# Altium PCB Layout.PcbDoc
Units mm, origin at the board's own origin, x right, y up, seen from the top; angles counter-clockwise.
Board outline 75 x 75 mm, 4 copper layers (Top Layer, Mid 1, Mid 2, Bottom Layer), stack 0.603 mm thick; 72 components, 26 nets, 148 pads, 148 vias.
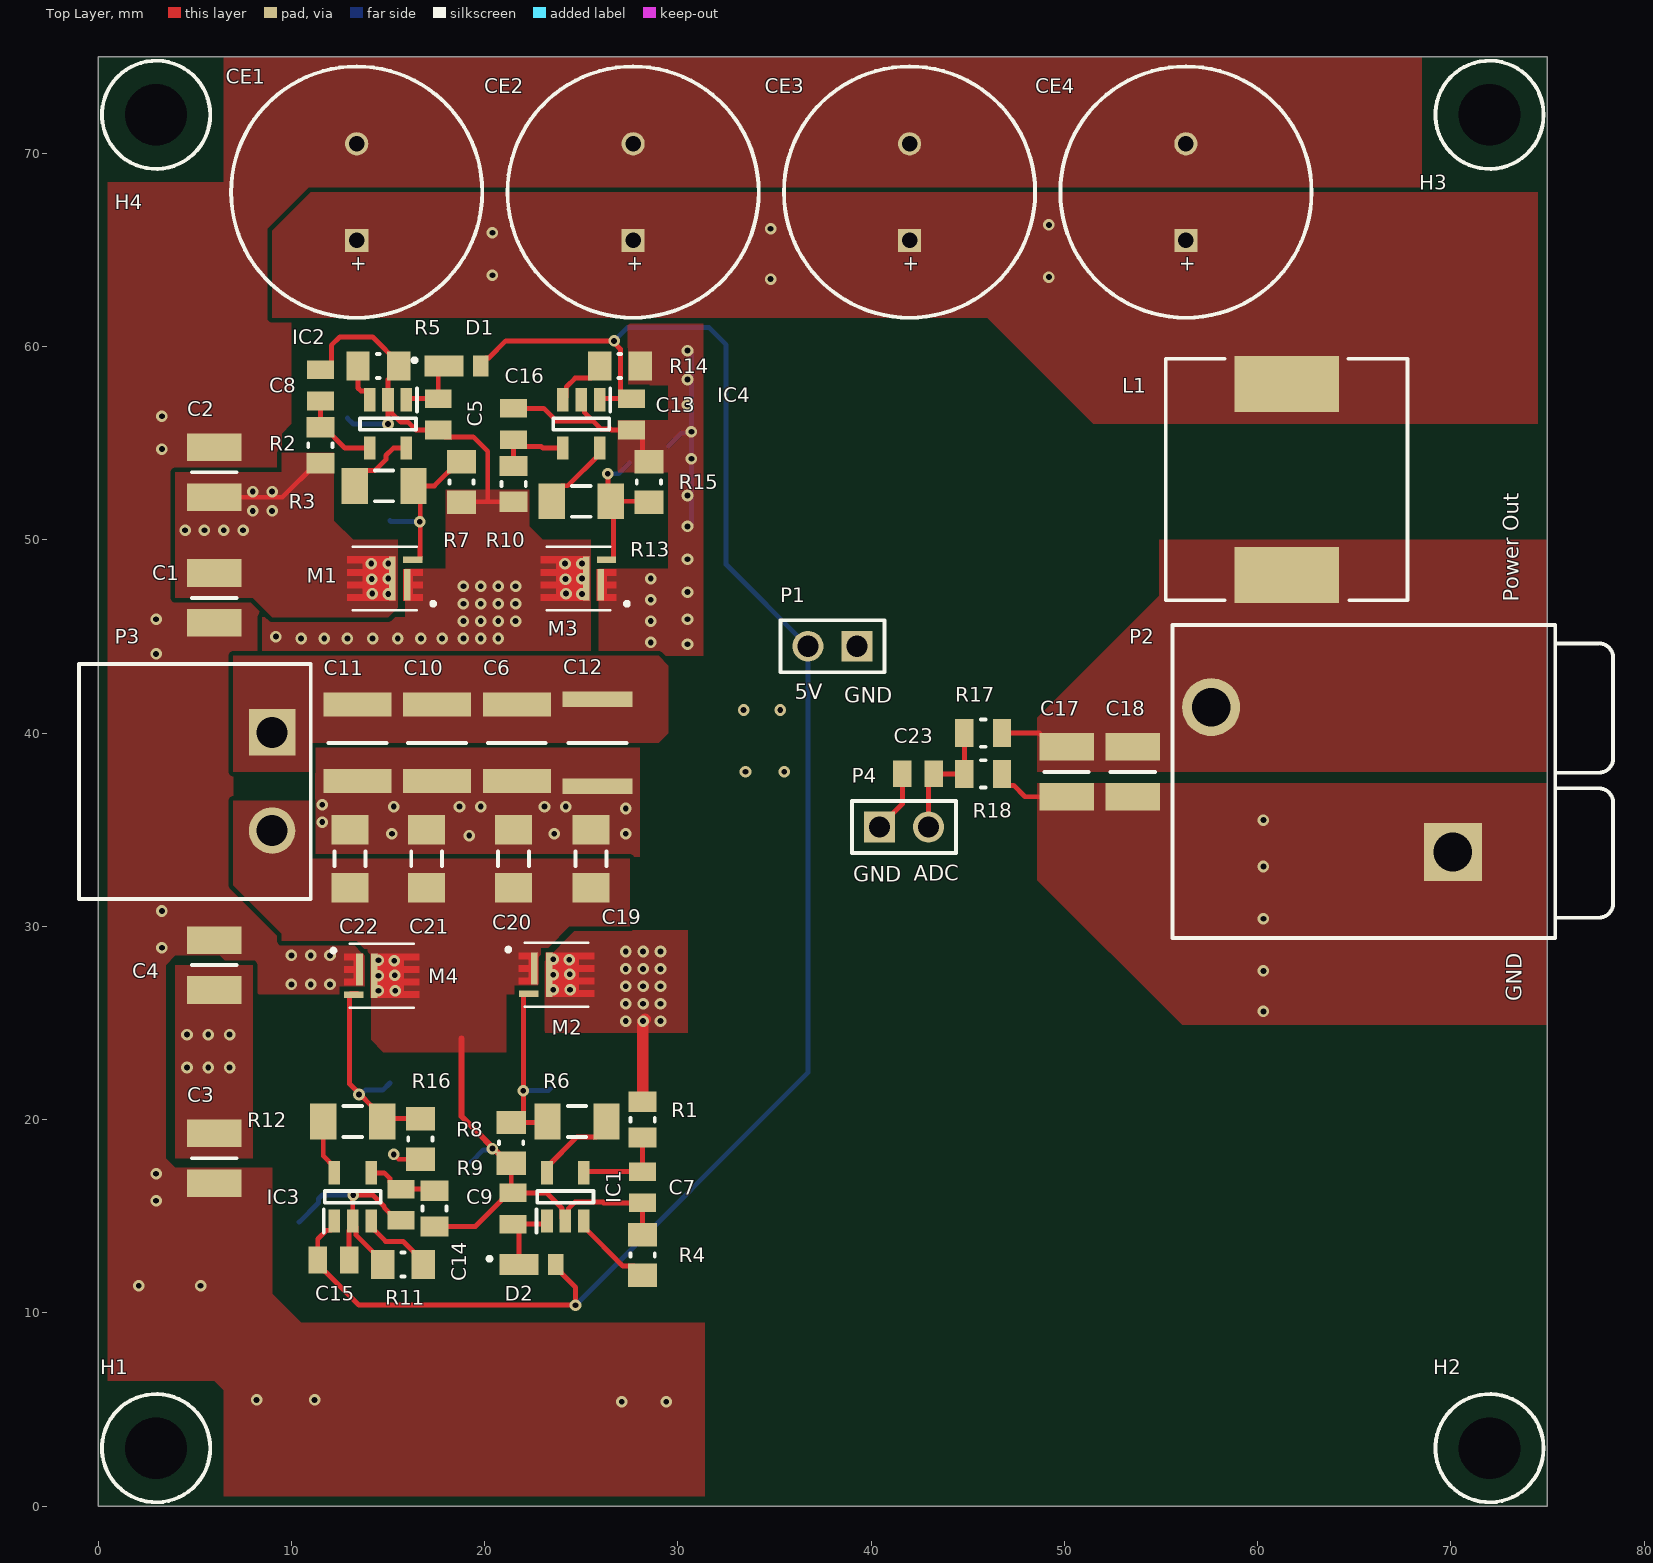
[diagram p0: Top Layer view]
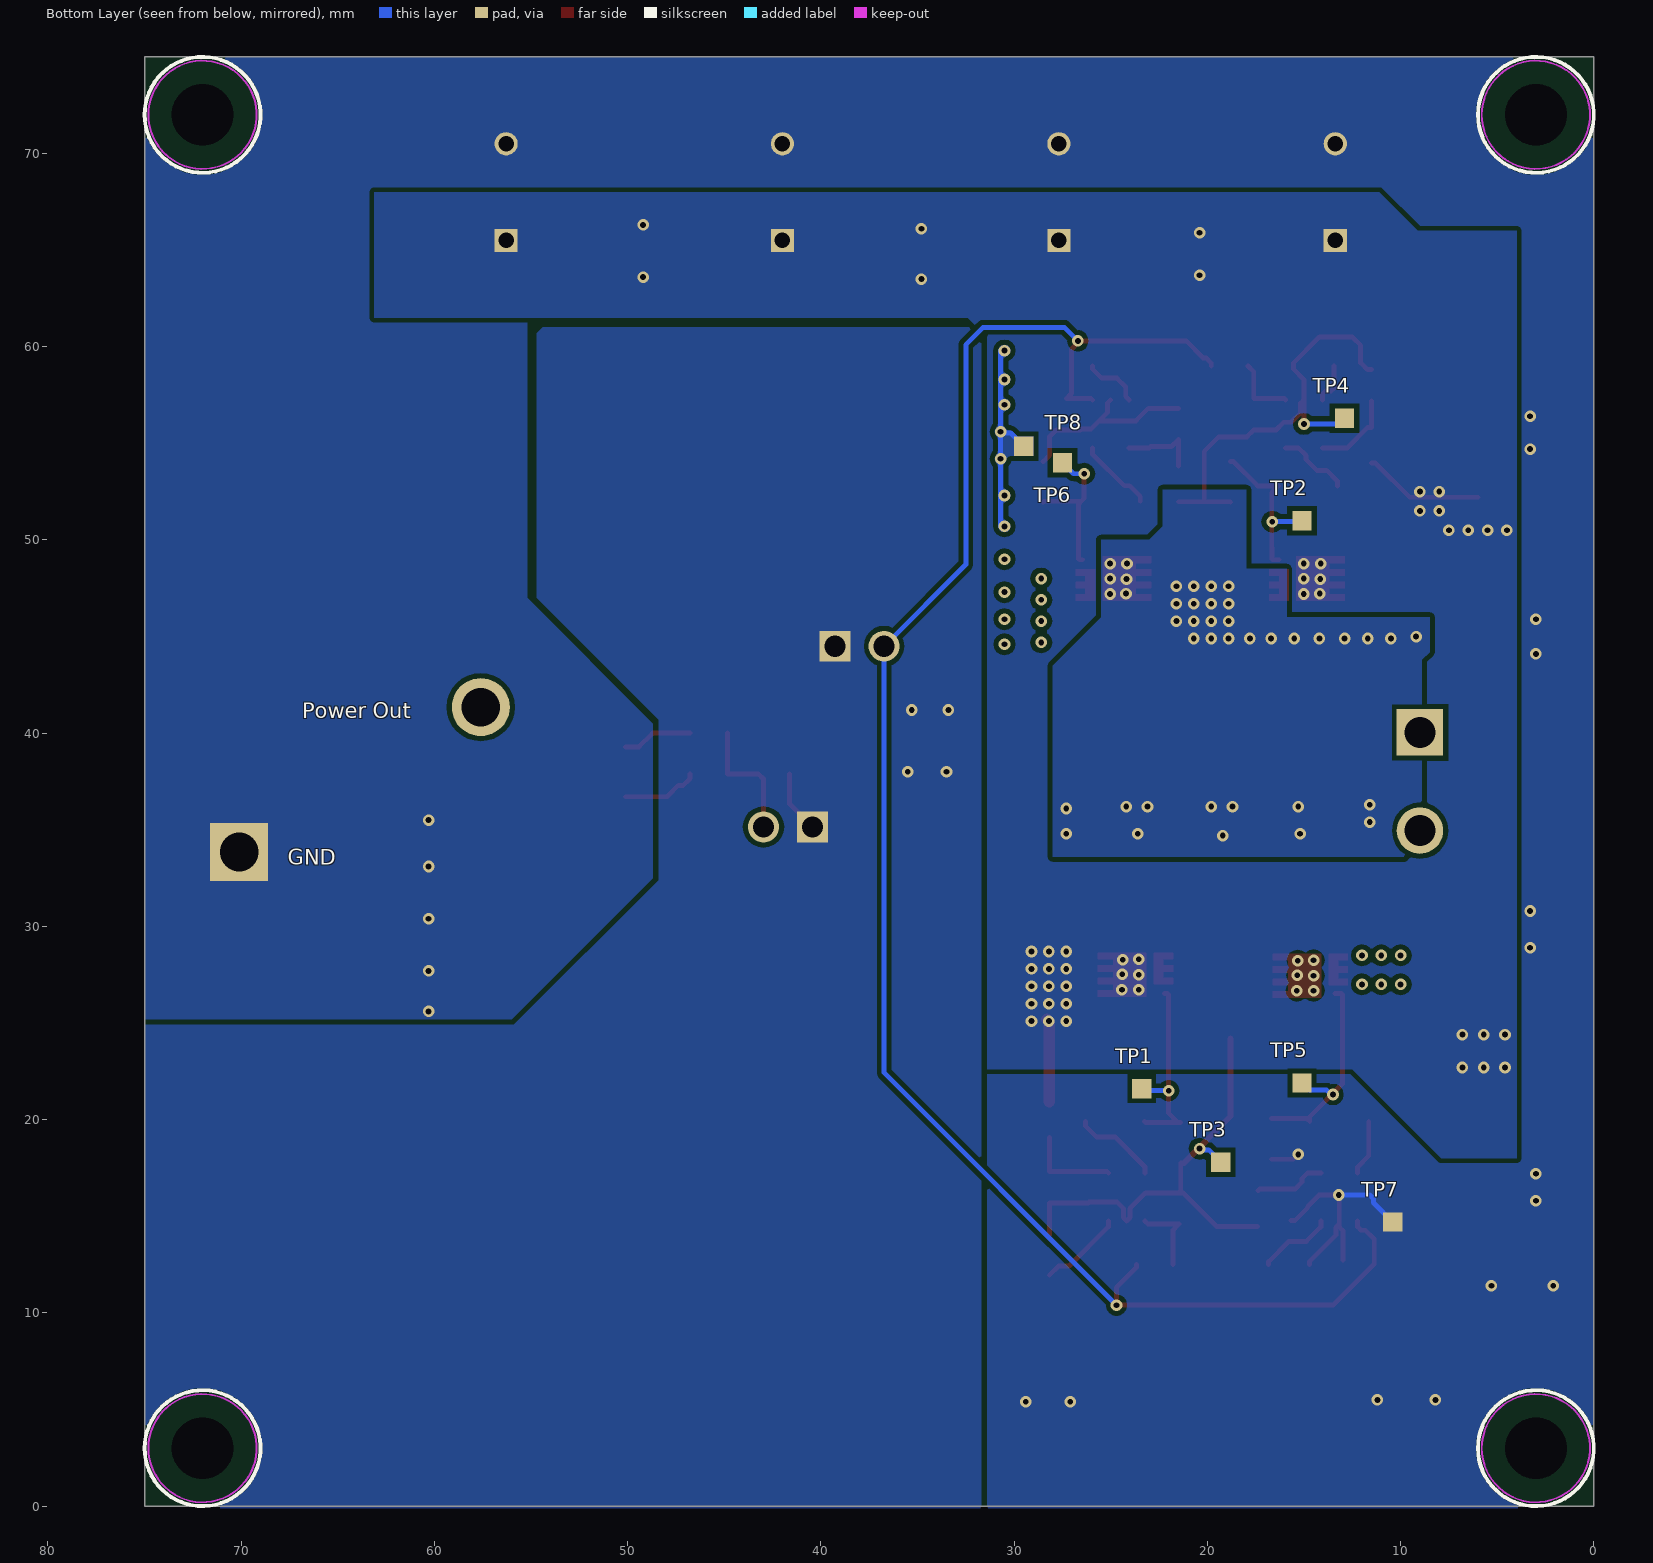
[diagram p1: Bottom Layer view, seen from below]
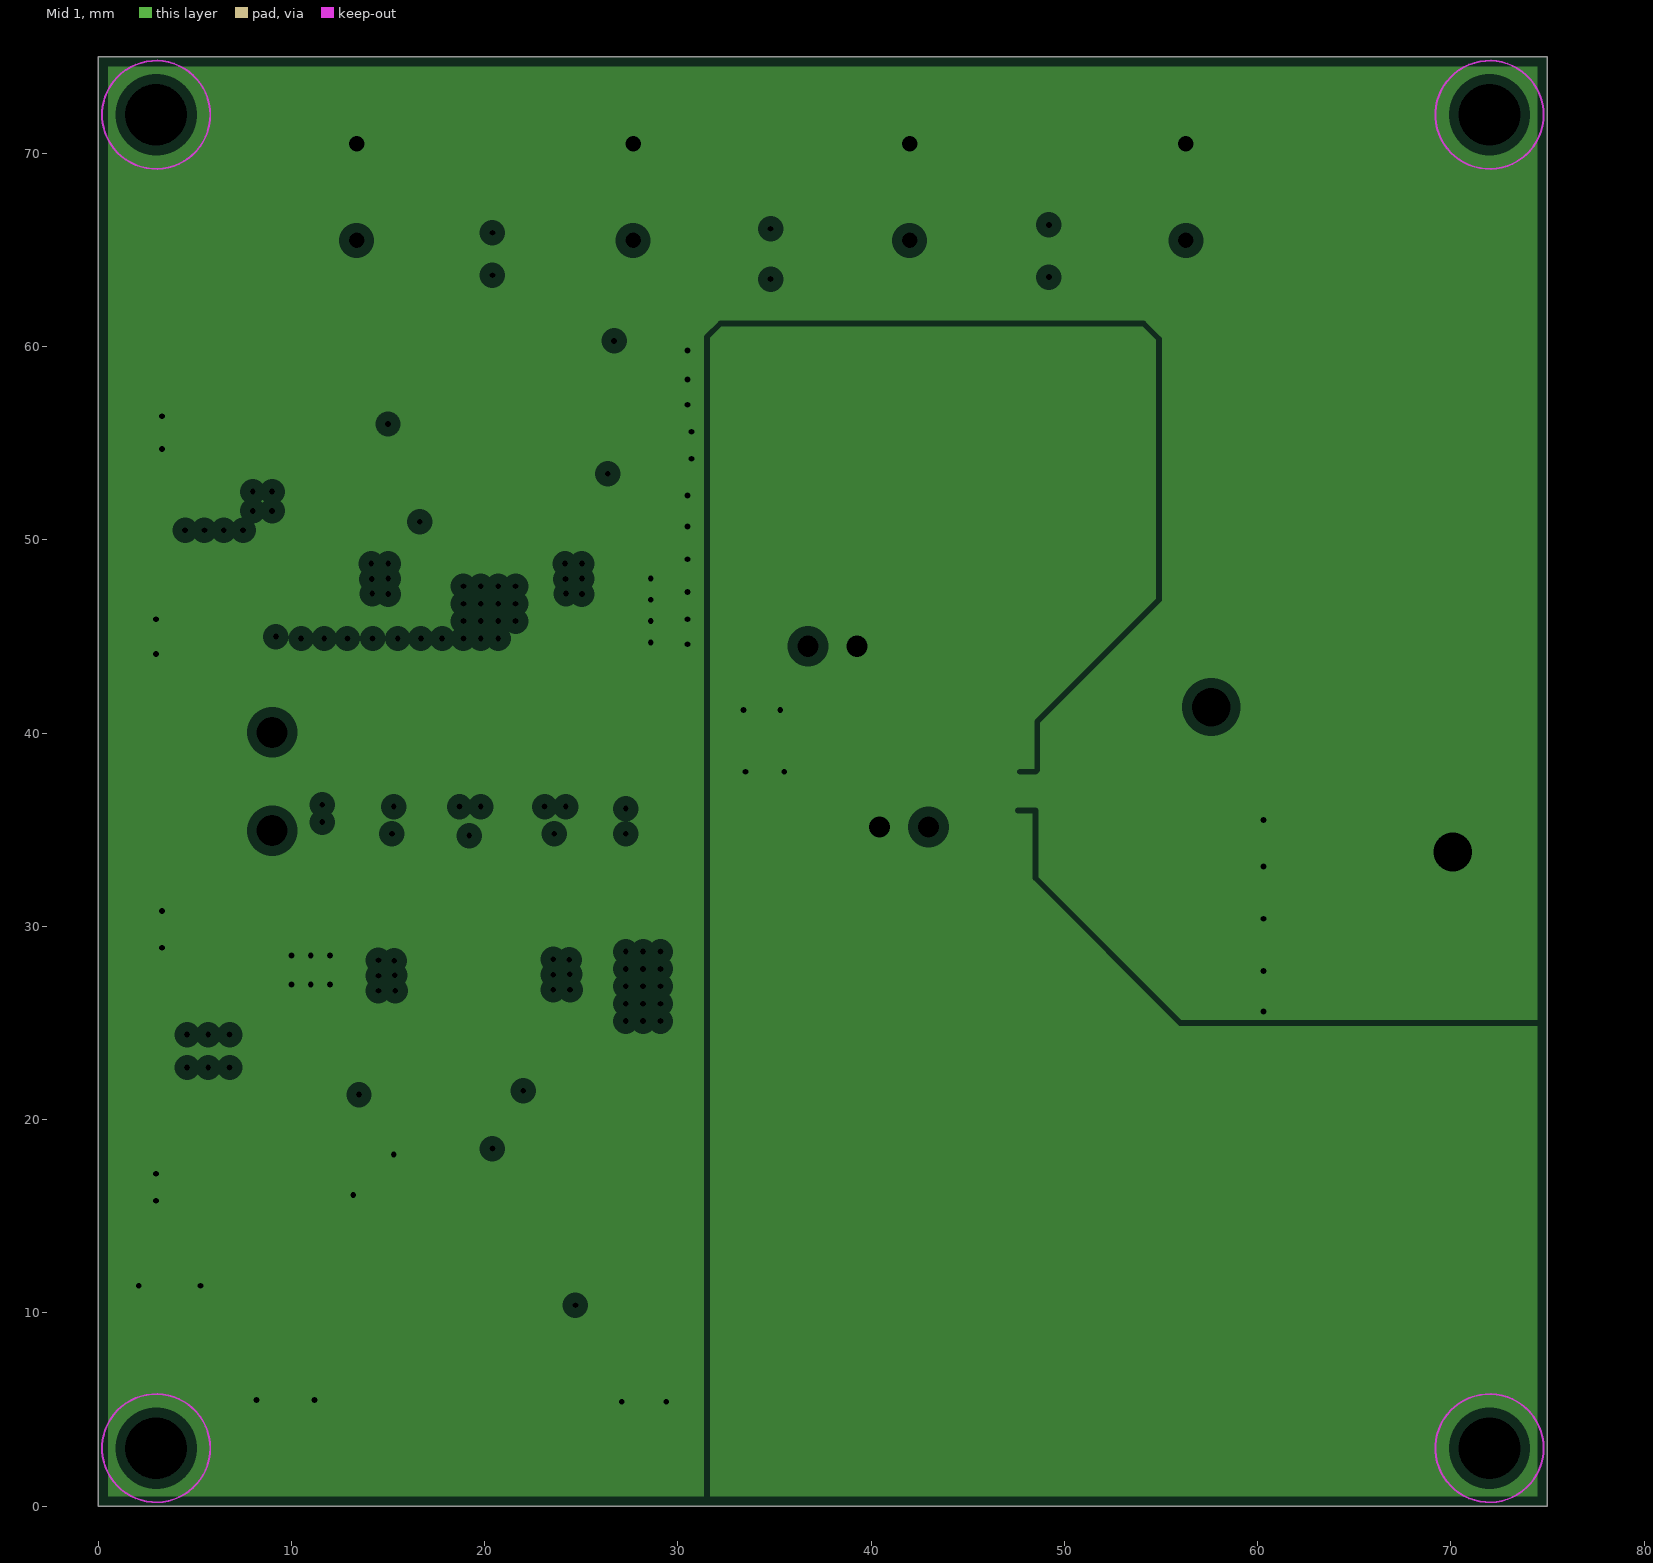
[diagram p2: Mid 1, clearances drawn from the general rule]
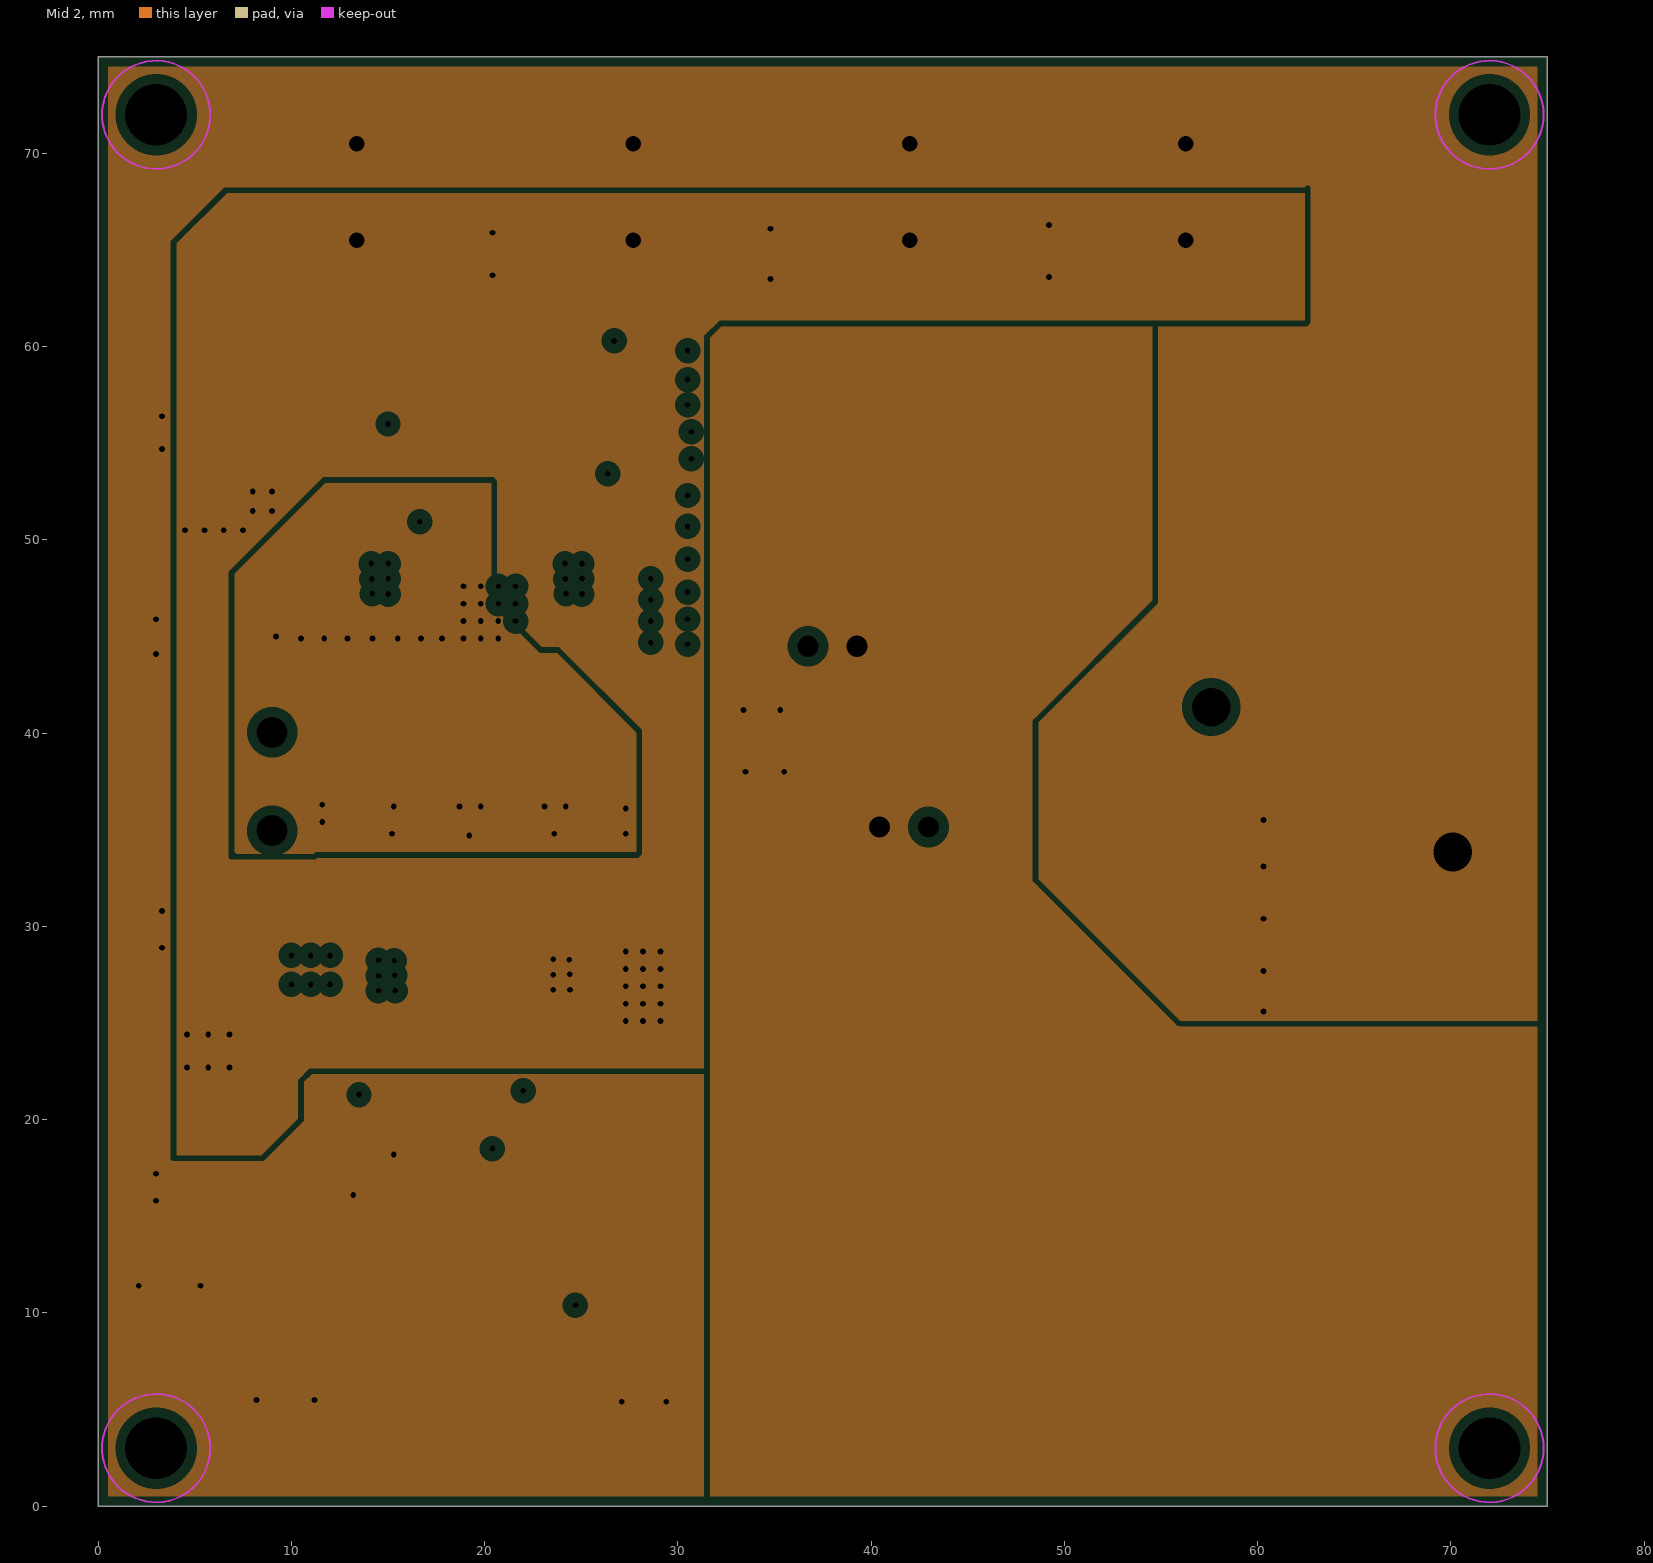
[diagram p3: Mid 2, clearances drawn from the general rule]
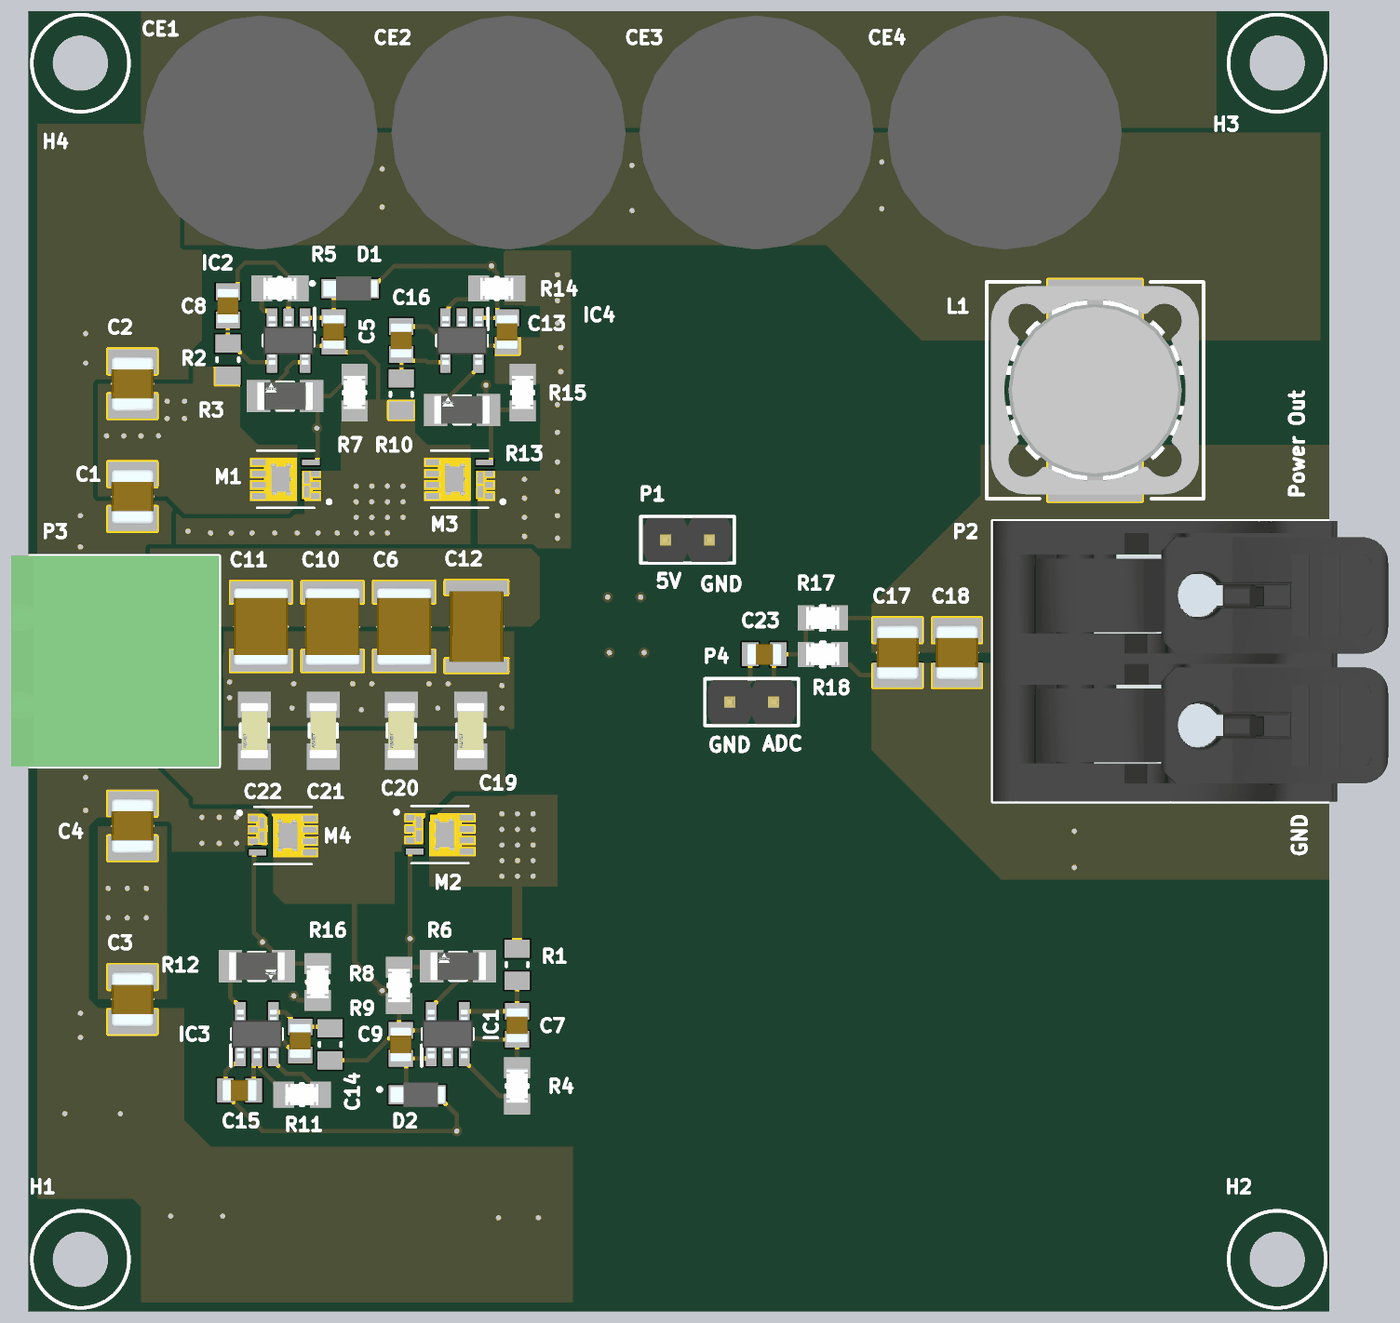
[diagram p4: 3D render of the assembled board from above, using the file's embedded part models]

## Layer stack, top to bottom
Top Solder: solder mask 0.0102, Solder Resist, Dk 3.5
Top Layer: signal copper 0.0356
Dielectric 2: prepreg 0.0711, PP-006, Dk 4.1
Mid 1: plane copper 0.035, net GND
Dielectric 1: dielectric 0.32, FR-4, Dk 4.8
Mid 2: plane copper 0.035
Dielectric 3: prepreg 0.0711, PP-006, Dk 4.1
Bottom Layer: signal copper 0.0356
Bottom Solder: solder mask 0.0102, Solder Resist, Dk 3.5

## Board outline
0,75 75,75 75,0 0,0

## Design rules (kind name [scope] priority, off if disabled: settings)
Clearance [All] p1: gap=0.254 ignorepadtopadclearanceinfootprint=TRUE except(0: Arc-Hole Track-Hole SMDPad-Hole THPad-Hole Via-Hole Fill-Hole Poly-Hole Region-Hole Text-Hole)
Height [All] p1: minheight=0 maxheight=30 prefheight=12.7
HoleSize [All] p1: absolutevalues=TRUE maxlimit=30 minlimit=0.025 maxpercent=80.000 minpercent=20.000
HoleToHoleClearance [All] p1: gap=0.1 allowstackedmicrovias=TRUE
MinimumSolderMaskSliver [All] p1: minsoldermaskwidth=0.1
PlaneClearance [All] p1: clearance=0.508
PlaneConnect [All] p1: planeconnectstyle=Direct reliefexpansion=0.508 reliefentries=4 reliefconductorwidth=0.254 reliefairgap=0.254
PolygonConnect [All] p1: connectstyle=Direct reliefconductorwidth=0.254 reliefentries=4 polygonreliefangle="90 Angle" airgapwidth=0.254
RoutingVias [All] p1: holewidth=0.3 width=0.6 viastyle="Through Hole" minholewidth=0.3 minwidth=0.6 maxholewidth=0.711 maxwidth=1.27
SilkToSilkClearance [All] p1: silktosilkclearance=0.1
SilkToSolderMaskClearance [IsPad] p1: minsilkscreentomaskgap=0.1 clearancetoexposedcopper=TRUE
SolderMaskExpansion [All] p1: expansion=0.102 istentingtop=FALSE
Width [All] p1: maxlimit=0.6 minlimit=0.254 preferedwidth=0.254
22 further rules are at their usual default settings.

## Components (designator, comment, footprint, x,y, rotation, side; value= is the part's Value field where it differs from the comment)
C1 "885012209048" CAPC3225X280N 6,47 r90 top
C2 "885012209048" CAPC3225X280N 6,53.5 r270 top
C3 "885012209048" CAPC3225X280N 6,18 r90 top
C4 "885012209048" CAPC3225X280N 6,28 r270 top
C5 "885012207098" CAPC2012X90N 17.6,56.5 r90 top
C6 "C1812C104JAGACAUTO" CAPC4532X220N 21.663,39.5 r270 top
C7 "885012007057" CAPC2012X70N 28.175,16.5 r90 top
C8 "885012007057" CAPC2012X70N 11.5,58 r270 top
C9 "885012207098" CAPC2012X90N 21.475,15.4 r270 top
C10 "C1812C104JAGACAUTO" CAPC4532X220N 17.539,39.5 r270 top
C11 "C1812C104JAGACAUTO" CAPC4532X220N 13.414,39.5 r270 top
C12 "C4532C0G2E473J320KA" CAPC4532X350N 25.837,39.5 r270 top
C13 "885012207098" CAPC2012X90N 27.6,56.5 r90 top
C14 "885012007057" CAPC2012X70N 15.675,15.6 r90 top
C15 "885012207098" CAPC2012X90N 12.175,12.746 r180 top
C16 "885012007057" CAPC2012X70N 21.5,56 r270 top
C17 "885012209048" CAPC3225X280N 50.111,38 r90 top
C18 "885012209048" CAPC3225X280N 53.536,38 r90 top
C19 "C1206C471J1GAC" FP-C1206C-EB-IPC_A 25.5,33.5 r90 top value="470 pF"
C20 "C1206C471J1GAC" FP-C1206C-EB-IPC_A 21.5,33.5 r90 top value="470 pF"
C21 "C1206C471J1GAC" FP-C1206C-EB-IPC_A 17,33.5 r90 top value="470 pF"
C22 "C1206C471J1GAC" FP-C1206C-EB-IPC_A 13.032,33.5 r90 top value="470 pF"
C23 "885012207092" CAPC2012X90N 42.431,37.9 r0 top
CE1 "860160578032" CAPPRD500W62D1300H2650 13.379,65.5 r90 top
CE2 "860160578032" CAPPRD500W62D1300H2650 27.684,65.5 r90 top
CE3 "860160578032" CAPPRD500W62D1300H2650 41.988,65.5 r90 top
CE4 "860160578032" CAPPRD500W62D1300H2650 56.292,65.5 r90 top
D1 "RB400VAM-50TR" RB400VAM50TR 17.9,59 r270 top
D2 "RB400VAM-50TR" RB400VAM50TR 21.775,12.5 r270 top
H1 "M3 Mounting Hole" "M3 HOLE" 3,3 r0 top
H2 "M3 Mounting Hole" "M3 HOLE" 72,3 r0 top
H3 "M3 Mounting Hole" "M3 HOLE" 72,72 r0 top
H4 "M3 Mounting Hole" "M3 HOLE" 3,72 r0 top
IC1 "IR1161LTRPBF" SOT95P280X145-5N 24.175,16 r90 top
IC2 "IR1161LTRPBF" SOT95P280X145-5N 15,56 r270 top
IC3 "IR1161LTRPBF" SOT95P280X145-5N 13.175,16 r90 top
IC4 "IR1161LTRPBF" SOT95P280X145-5N 25,56 r270 top
L1 "742792901" WE-PF 61.5,53.129 r270 top
M1 "BSZ070N08LS5ATMA1" TRANS_BSZ037N06LS5ATMA1 14.835,48 r180 top
M2 "BSZ070N08LS5ATMA1" TRANS_BSZ037N06LS5ATMA1 23.725,27.5 r0 top
M3 "BSZ070N08LS5ATMA1" TRANS_BSZ037N06LS5ATMA1 24.86,48 r180 top
M4 "BSZ070N08LS5ATMA1" TRANS_BSZ037N06LS5ATMA1 14.675,27.45 r0 top
P1 "61300211121" 61300211121 38,44.5 r180 top
P2 "691404910002B" 691404910002B 67,37.5 r90 top
P3 "691313510002" 691313510002 5,37.5 r270 top
P4 "61300211121" 61300211121 41.7,35.146 r0 top
R1 "CRCW08051K00FKEA" RESC2013X50X30NL20T20 28.175,20 r90 top
R2 "CRCW08051K00FKEA" RESC2013X50X30NL20T20 11.5,54.9 r90 top
R3 "CRCW120610R0FKEA" FP-CRCW1206-E3-IPC_A 14.8,52.8 r180 top
R4 "CRCW080510K0FKEA" FP-CRCW0805-E3-IPC_A 28.175,13 r270 top
R5 "CRCW080510K0FKEA" FP-CRCW0805-E3-IPC_A 14.5,59 r180 top
R6 "CRCW120610R0FKEA" FP-CRCW1206-E3-IPC_A 24.775,19.908 r180 top
R7 "CRCW080510K0FKEA" FP-CRCW0805-E3-IPC_A 18.8,53 r90 top
R8 "CRCW080510K0FKEA" FP-CRCW0805-E3-IPC_A 21.375,18.8 r270 top
R9 "CRCW08051K00FKEA" RESC2013X50X30NL20T20 17.4,15.4 r270 top
R10 "CRCW08051K00FKEA" RESC2013X50X30NL20T20 21.5,52.9 r90 top
R11 "CRCW080510K0FKEA" FP-CRCW0805-E3-IPC_A 15.775,12.5 r0 top
R12 "CRCW120610R0FKEA" FP-CRCW1206-E3-IPC_A 13.175,19.908 r0 top
R13 "CRCW120610R0FKEA" FP-CRCW1206-E3-IPC_A 25,52 r180 top
R14 "CRCW080510K0FKEA" FP-CRCW0805-E3-IPC_A 27,59 r180 top
R15 "CRCW080510K0FKEA" FP-CRCW0805-E3-IPC_A 28.5,53 r270 top
R16 "CRCW080510K0FKEA" FP-CRCW0805-E3-IPC_A 16.675,19 r270 top
R17 "CRCW08051M00FKEA" FP-CRCW0805-e3-MFG 45.8,40 r0 top
R18 "CRCW0805120KFKEA" FP-CRCW0805-e3-MFG 45.8,37.896 r180 top
TP1 "TP" "TEST POINT" 23.4,21.6 r180 bottom
TP2 "TP" "TEST POINT" 15.1,51 r180 bottom
TP3 "TP" "TEST POINT" 19.3,17.8 r180 bottom
TP4 "TP" "TEST POINT" 12.9,56.3 r180 bottom
TP5 "TP" "TEST POINT" 15.1,21.9 r180 bottom
TP6 "TP" "TEST POINT" 27.5,54 r180 bottom
TP7 "TP" "TEST POINT" 10.4,14.7 r180 bottom
TP8 "TP" "TEST POINT" 29.5,54.85 r180 bottom

## Footprints (in the part's own frame and the unit in brackets; to place one, negate y for a bottom-side part, rotate by r counter-clockwise, add the part's x,y. Pads: shape width x height; smd on the part's side, far side on the other; paste and mask are expansions set on the pad)
61300211121 [mm] "Pin Header, pitch 2.54 mm, THT, Vertical, single row, 2p"
  rect 1.6x1.6 hole 1.1: 1(-1.27,0)
  round 1.6 hole 1.1: 2(1.27,0)
  silkscreen extent -2.69,-1.35 2.69,1.35, body extent -2.54,-1.27 2.54,1.27, height 8.57
691313510002 [mm] "5,08mm - PCB Headers - Horizontal - Closed ends - 02p"
  rect 2.4x2.4 hole 1.6: 1(-2.54,4)
  round 2.4 hole 1.6: 2(2.54,4)
  silkscreen extent -6.08,-6 6.08,6, body extent -6.08,-6 6.08,6, height 8.55
691404910002B [mm] "7.50 mm Screwless Clamp Power Connector, 2p"
  rect 3x3 hole 2: 1(-3.65,-3.1)
  round 3 hole 2: 2(3.85,9.4)
  silkscreen extent -8.1,-11.4 8.1,11.4, body extent -8.1,-11.4 8.1,11.4, height 24.16
CAPC2012X70N [mm]
  rect 0.96x1.39 smd: 1(-0.81,0) 2(0.81,0)
  body extent -1,-0.63 1,0.63, height 0.7
CAPC2012X90N [mm]
  rect 0.96x1.39 smd: 1(-0.81,0) 2(0.81,0)
  body extent -1,-0.63 1,0.63, height 0.9
CAPC3225X280N [mm]
  rect 1.43x2.82 smd: 1(-1.29,0) 2(1.29,0)
  silkscreen extent 0,-1.15 0,1.15, body extent -1.6,-1.25 1.6,1.25, height 2.8
CAPC4532X220N [mm]
  rect 1.25x3.52 smd: 1(-1.98,0) 2(1.98,0)
  silkscreen extent 0,-1.5 0,1.5, body extent -2.25,-1.6 2.25,1.6, height 2.2
CAPC4532X350N [mm]
  rect 0.81x3.61 smd: 1(-2.25,0) 2(2.25,0)
  silkscreen extent 0,-1.5 0,1.5, body extent -2.05,-1.57 2.05,1.57, height 3.46
CAPPRD500W62D1300H2650 [mm]
  rect 1.2x1.2 hole 0.8: 1(0,0)
  round 1.2 hole 0.8: 2(5,0)
  silkscreen extent -4,-6.5 9,6.5, body extent -4.25,-6.75 9.25,6.75, height 26.5
FP-C1206C-EB-IPC_A [mm]
  rect 1.505x1.906 smd paste+0 mask+0: 1(-1.501,0) 2(1.501,0)
  silkscreen extent -0.37,-0.8 0.37,0.8, body extent -2.75,-1.45 2.75,1.45, height 0.25
FP-CRCW0805-E3-IPC_A [mil]
  rect 47.5x59.38 smd paste+0 mask+0: 1(-41.37,0) 2(41.37,0)
  silkscreen extent -3,-25 3,25, body extent -85,-49 85,49, height 10
FP-CRCW0805-e3-MFG [mm]
  rect 0.95x1.45 smd paste+0 mask+0: 1(-0.975,0) 2(0.975,0)
  silkscreen extent -0.13,-0.7 0.13,0.7, body extent -1.55,-0.82 1.55,0.82, height 0.25
FP-CRCW1206-E3-IPC_A [mm]
  rect 1.356x1.858 smd paste+0 mask+0: 1(-1.526,0) 2(1.526,0)
  silkscreen extent -0.47,-0.8 0.47,0.8, body extent -2.7,-1.43 2.7,1.43, height 0.25
"M3 HOLE" [mm]
  round 0 hole 3.2 unplated mask+0.1: 1(0,0)
  Keep-Out Layer circle w0.1: c0,0 r2.8
  silkscreen extent -2.8,-2.8 2.8,2.8
RB400VAM50TR [mm]
  rect 1.1x2 smd: 1(0,0)
  rect 1.1x0.8 smd: 2(0,1.9)
  silkscreen extent -0.4,-1.62 -0.2,-1.43, body extent -0.7,-0.89 0.7,2.22, height 0.9
RESC2013X50X30NL20T20 [mm] "Chip Resistor, 2-Leads, Body 2.00x1.25mm, IPC Medium Density"
  rect 1.05x1.45 smd: 1(-0.925,0) 2(0.925,0)
  silkscreen extent -0.1,-0.63 0.1,0.63, body extent -1.1,-0.72 1.1,0.72, height 0.5
SOT95P280X145-5N [mm]
  rect 1.2x0.6 smd: 1(-1.25,0.95) 2(-1.25,0) 3(-1.25,-0.95) 4(1.25,-0.95) 5(1.25,0.95)
  silkscreen extent -1.85,-1.45 0.3,1.5, body extent -1.4,-1.45 1.4,1.45, height 1.45
"TEST POINT" [mm]
  rect 1x1 smd: 1(0,0)
TRANS_BSZ037N06LS5ATMA1 [mm]
  rect 0.34x1.64 smd paste-2 mask+0: 1-2-3(-1.15,0.325)
  rect 1x0.34 smd: 4(-1.45,-0.975)
  rect 0.34x2.29 smd paste-2 mask+0: 5-6-7-8(-0.39,0)
  Top Layer region: -0.95,-0.495 -1.95,-0.495 -1.95,-0.155 -1.45,-0.155 -1.45,0.155 -1.95,0.155 -1.95,0.495 -1.45,0.495 -1.45,0.805 -1.95,0.805 -1.95,1.145 -0.95,1.145
  Top Layer region: 1.95,0.805 1.15,0.805 1.15,0.495 1.95,0.495 1.95,0.155 1.15,0.155 1.15,-0.155 1.95,-0.155 1.95,-0.495 1.15,-0.495 1.15,-0.805 1.95,-0.805 1.95,-1.145 -0.56,-1.145 -0.56,1.145 1.95,1.145
  silkscreen extent -2.6,-1.65 1.65,1.65
WE-PF [mm] "Inductor, 2-Leads, Body 12.0x12.0mm"
  rect 2.9x5.4 smd: 1(-4.95,0) 2(4.95,0)
  silkscreen extent -6.25,-6.25 6.25,6.25, body extent -6,-6 6,6, height 7.99

## Part data
C1 C2 C3 C4 C17 C18: library part 4.7uF, "Capacitor / Output Filtering", Manufacturer_Name="Wurth Elektronik", Supplier Part Number 1=710-885012209048, Datasheet Link=https://katalog.we-online.com/pbs/datasheet/885012209048.pdf, Height=2.8mm, Manufacturer_Part_Number=885012209048, Supplier 1=Mouser
C5 C9 C13 C15: library part 100nF/50V, "Capacitor", Manufacturer_Name="Wurth Elektronik", Mouser2 Part Number=710-885012207098, Datasheet Link=https://componentsearchengine.com//885012207098.pdf, Height=0.9mm, Manufacturer_Part_Number=885012207098, Mouser2 Price/Stock=https://www.mouser.com/Search/Refine.aspx?Keyword=710-885012207098, Supplier 1=Mouser, Supplier Part Number 1=710-885012207098
C6 C10 C11: library part "Resonant Tank Cap", "100nF/250V Capacitor 1812", Manufacturer_Name=Kemet, Supplier Part Number 1=80-C1812C104JAGAUTO, Datasheet Link=https://api.kemet.com/component-edge/download/datasheet/C1812C104JAGACAUTO.pdf, Height=2.2mm, Manufacturer_Part_Number=C1812C104JAGACAUTO, Supplier 1=Mouser
C7 C8 C14 C16: library part 100pF, "Capacitor", Manufacturer_Name="Wurth Elektronik", Supplier Part Number 1=710-885012007057, Datasheet Link=https://katalog.we-online.com/pbs/datasheet/885012007057.pdf, Height=0.7mm, Manufacturer_Part_Number=885012007057, Supplier 1=Mouser
C12: library part 47nF, "Capacitor", Manufacturer_Name=TDK, Supplier Part Number 1=810-C4532C0G2E473J, Datasheet Link=https://product.tdk.com/info/en/catalog/datasheets/mlcc_commercial_midvoltage_en.pdf, Height=3.5mm, Manufacturer_Part_Number=C4532C0G2E473J320KA, Supplier 1=Mouser
C19 C20 C21 C22: library part 470pF/100V, "C1206 470 pF C0G 5.00% 100 V", Capacitance="470 pF", Manufacturer=KEMET, Package=C1206C-EB, Supplier Part Number 1=80-C1206C471J1GAC, Temperature="-55°C to +150°C", Temperature Characteristic=C0G, Temperature Coefficient=15%, Temperature Range High=+150°C, Temperature Range Low=-55°C, Tolerance=0.05, Voltage Rating="100 V", Automotive=Yes, Automotive Grade="Grade 0", Category=Cap, ComponentLink2Description=Datasheet, ComponentLink2URL=https://content.kemet.com/datasheets/KEM_C1007_X8R_ULTRA_150C_SMD.pdf, Device Class L1="Passive Components", Device Class L2=Capacitors, Device Class L3="Ceramic Capacitors", Height=0.88mm, Ipc Land Pattern Name=CAPC320160X78, Lead Free=Yes, Manufacturer Part Number=C1206C471J1GAC, Material=Ceramic, Mouser Description="Multilayer Ceramic Capacitors MLCC - SMD/SMT 100volts 470pF 5% C0G", Octopart=https://octopart.com/c1206c471j1gac-kemet-1343252, RoHS=TRUE, Supplier 1=Mouser
C23: library part "10nF 0805 Cap", "Capacitor", Manufacturer_Name="Wurth Elektronik", Supplier Part Number 1=710-885012207092, Datasheet Link=https://katalog.we-online.com/pbs/datasheet/885012207092.pdf, Height=0.9mm, Manufacturer_Part_Number=885012207092, Supplier 1=Mouser
CE1 CE2 CE3 CE4: library part "1000uF Output Cap", "Capacitor 1000uF Input Filtering", Manufacturer_Name="Wurth Elektronik", Supplier Part Number 1=710-860160578032, Datasheet Link=https://katalog.we-online.de/pbs/datasheet/860160578032.pdf, Height=26.5mm, Manufacturer_Part_Number=860160578032, Supplier 1=Mouser
D1 D2: library part "Schottky Diode", "Schottky Diode", Manufacturer_Name="ROHM Semiconductor", Mouser2 Part Number=755-RB400VAM-50TR, Datasheet Link=https://componentsearchengine.com//RB400VAM-50TR.pdf, Height=0.8mm, Manufacturer_Part_Number=RB400VAM-50TR, Mouser2 Price/Stock=https://www.mouser.com/Search/Refine.aspx?Keyword=755-RB400VAM-50TR, Supplier 1=Mouser, Supplier Part Number 1=755-RB400VAM-50TR
H1 H2 H3 H4: library part M3_Mounting_hole
IC1 IC2 IC3 IC4: library part "Gate Driver IC", "Integrated Circuit", Manufacturer_Name=Infineon, Supplier Part Number 1=942-IR1161LTRPBF, Height=1.45mm, Manufacturer_Part_Number=IR1161LTRPBF, Supplier 1=Mouser
L1: library part "Output Filter Inductor", "SMD EMI Suppression Power Ferrite WE-PF, Z = 2900 Ohm", Supplier Part Number 1=710-742792901, ComponentLink1Description="Manufacturer Link", ComponentLink1URL=http://www.we-online.com, ComponentLink2Description=Datasheet, ComponentLink2URL=http://www.we-online.de/katalog/media/pdf/742792901.pdf, DatasheetVersion="ver 6, Apr-2007", Impedance="2900 Ohm", PackageDescription="Inductor, 2-Leads, Body 12.0 x 12.0 mm", PackageReference=WE-PF, PackageVersion=2007, Supplier 1=Mouser
M1 M2 M3 M4: library part "MOSFET Diode", "Further performance improvements with best-in-class OptiMOSâ„¢ 5 60V power MOSFET in high performance PQFN 3.3x3.3mm package", Package="TSDSON-8 Infineon Technologies", Supplier Part Number 1=726-BSZ070N08LS5ATMA, Availability=Unavailable, MF="Infineon Technologies", MP=BSZ037N06LS5ATMA1, Price=None, SnapEDA_Link=https://www.snapeda.com/parts/BSZ037N06LS5ATMA1/Infineon%20Technologies/view-part/4422719/?ref=snap, Supplier 1=Mouser
P1 P4: library part "5V Input", "THT Vertical Pin Header WR-PHD, Pitch 2.54 mm, Single Row, 2 pins", Contact Resistance=20mOhm, Manufacturer="Wurth Elektronik", Operating Temperature=-40to105degC, Rated Current=3A, Supplier Part Number 1=710-61300211121, Withstanding Voltage=500VAC, Working Voltage=250VAC, Datasheet URL=https://katalog.we-online.de/em/datasheet/6130xx11121.pdf, Gender=Male, Manufacturer URL=http://www.we-online.de, Mounting Technology=THT, Orientation=Vertical, Package Reference=61300211121, Packaging=Bag, Part Number=61300211121, Pin Number=2, Pitch=2.54mm, Publisher=WurthElektronik, Row Number=Single, Supplier 1=Mouser
P2: library part "Power Output", "Serie 4049 B - 7.50mm Screwless Clamp Power Connector WR-TBL, 2 pin", Manufacturer="Wurth Elektronik", Operating Temperature=-40to105degC, Supplier Part Number 1=710-691404910002B, Datasheet URL=http://katalog.we-online.de/em/datasheet/6914049100xxB.pdf, Manufacturer URL=http://www.we-online.de, Mounting Technology=THT, Package Reference=691404910002B, Packaging=Box, Part Number=691404910002B, Pin Number=2, Pitch=7.50mm, Publisher=WurthElektronik, Supplier 1=Mouser
P3: library part "Power Input", "Serie 313 - 5.08mm Close Horizontal PCB Header WR-TBL, 2 pin", Manufacturer="Wurth Elektronik", Operating Temperature=-40to105degC, Supplier Part Number 1=710-691313510002, Datasheet URL=http://katalog.we-online.de/em/datasheet/6913135100xx.pdf, Gender=Male, Manufacturer URL=http://www.we-online.de, Mounting Technology=THT, Package Reference=691313510002, Packaging=Box, Part Number=691313510002, Pin Number=2, Pitch=5.08mm, Publisher=WurthElektronik, Supplier 1=Mouser
R1 R2 R9 R10: library part "1k Ohm", Manufacturer="Vishay Dale", Supplier Part Number 1=71-CRCW0805-1.0K-E3, Part Number=CRCW08051K00FKEA, Supplier 1=Mouser
R3 R6 R12 R13: library part "10 Ohm", "RES Thick Film, 10Ω, 1%, 0.25W, 100ppm/°C, 1206", Case Code (Imperial)=1206, Case Code (Metric)=3216, Max Operating Temperature=155°C, Max Power Dissipation=250mW, Min Operating Temperature=-55°C, Package Quantity=10, Resistance=10R, Supplier Part Number 1=8121782, Temperature Coefficient=100ppm/°C, Tolerance=1%, Voltage Rating=200V, Case/Package=1206, Composition="Thick Film", Contact Plating=Tin, Depth=1.6mm, Features="Automotive AEC-Q200", Height=0.55mm, Lead Free="Lead Free", Length=3.2mm, Military Standard=Not, Number of Pins=2, Number of Terminations=2, Packaging="Tape and Reel", Power Rating=250mW, Radiation Hardening=No, Supplier 1=RSComponents, Termination=SMD/SMT, Voltage Rating (DC)=200V, Weight=0.000353oz, Width=0.063inch
R4 R5 R7 R8 R11 R14 R15 R16: library part "10k Ohm", "RES Thick Film, 10kΩ, 1%, 0.125W, 100ppm/°C, 0805", Case Code (Imperial)=0805, Case Code (Metric)=2012, Max Operating Temperature=155°C, Min Operating Temperature=-55°C, Package Quantity=5000, Power Rating=125mW, Resistance=10kR, Supplier Part Number 1=71-CRCW0805-10K-E3, Temperature Coefficient=100ppm/°C, Tolerance=1%, Voltage Rating=150V, Case/Package=0805, Composition="Thick Film", Contact Plating=Tin, Depth=1.25mm, Height=0.45mm, Lead Free="Lead Free", Length=2mm, Military Standard=Not, Packaging="Tape and Reel", Radiation Hardening=No, Supplier 1=Mouser, Termination=SMD/SMT, Voltage Rating (DC)=150V, Weight=0.000194oz, Width=1.25mm
R17: library part "1M Ohm Resistor", "RES Thick Film, 1MΩ, 1%, 0.125W, 100ppm/°C, 0805", Case Code (Imperial)=0805, Case Code (Metric)=2012, Max Operating Temperature=155°C, Min Operating Temperature=-55°C, Package Quantity=5000, Power Rating=125mW, Resistance=1MR, Supplier Part Number 1=71-CRCW08051M00FKEAH, Temperature Coefficient=100ppm/°C, Tolerance=1%, Voltage Rating=150V, Case/Package=0805, Composition="Thick Film", Contact Plating=Tin, Depth=1.25mm, Height=0.45mm, Lead Free="Lead Free", Length=2mm, Military Standard=Not, Mount="Surface Mount", Number of Pins=2, Packaging="Tape and Reel", Radiation Hardening=No, Supplier 1=Mouser, Termination=SMD/SMT, Voltage Rating (DC)=150V, Weight=0.000194oz, Width=1.25mm
R18: library part "120Kohm Resistor", "RES Thick Film, 120kΩ, 1%, 0.125W, 100ppm/°C, 0805", Case Code (Imperial)=0805, Case Code (Metric)=2012, Max Operating Temperature=155°C, Max Power Dissipation=125mW, Min Operating Temperature=-55°C, Package Quantity=10, Resistance=120kR, Supplier Part Number 1=71-CRCW0805120KFKEA, Temperature Coefficient=100ppm/°C, Tolerance=1%, Voltage Rating=150V, Case/Package=0805, Composition="Thick Film", Contact Plating=Tin, Depth=1.25mm, Features="Automotive AEC-Q200", Height=0.45mm, Lead Free="Lead Free", Length=2mm, Military Standard=Not, Mount="Surface Mount", Number of Terminations=2, Packaging="Tape and Reel", Power Rating=125mW, Radiation Hardening=No, Supplier 1=Mouser, Termination=SMD/SMT, Voltage Rating (DC)=150V, Weight=0.000194oz, Width=0.049inch
TP1 TP2 TP3 TP4 TP5 TP6 TP7 TP8: library part "Test Point", "Test Point 1mm by 1mm"

## Via types
v1: diameter 0.6, hole 0.3, Top Layer to Bottom Layer, 148 vias

## Nets (pads, with @x,y where several pads share a name; then routed paths per layer and width w, separated by ;. In a path a pad name is that pad's centre, name@x,y a point inside that pad or via, vN(x,y) a via of type N, cw(c..) or ccw(c..) an arc to the next point about the centre after c; other vN are vias at no path point)
5V: C13.2 C15.2 D1.2 D2.2 IC3.1 IC4.1 P1.2 | length 94.5
  Top Layer w0.254: IC3.1 12.225,14.45 12.052,14.277 11.82,14.277 11.365,13.822 C15.2 11.365,12.531 13.496,10.4 v1(24.7,10.4) 24.7,11.325 23.675,12.35 D2.2 ; D1.2 19.8,59.15 20.073,59.423 20.223,59.423 21.1,60.3 v1(26.7,60.3) 26.7,60.206 27.032,59.874 27.032,57.578 27.3,57.31 26.01,57.31 IC4.1
  Bottom Layer w0.254: v1(24.7,10.4) 36.73,22.43 P1.2 32.5,48.73 32.5,60.1 31.6,61 27.4,61 v1(26.7,60.3)
GND: C1.1 C2.1 C3.1 C4.1 C13.1 C14.1 C15.1 C16.1 C17.1 C18.1 C23.1 CE1.2 CE2.2 CE3.2 CE4.2 IC3.2 IC4.2 M3.1-2-3 M4.1-2-3 P1.1 P2.1 P4.1 R11.1 R14.1 R15.1 R16.2 R18.1 TP7.1 TP8.1 | length 42
  Top Layer w0.254: C15.1 12.985,14.26 13.175,14.45 IC3.2@13.175,14.6 ; R11.1 14.724,12.651 13.348,14.027 13.348,14.427 IC3.2@13.175,14.6 ; v1(15.3,18.2) 15.551,17.949 R16.2 ; C14.1 15.46,14.79 14.806,15.444 14.806,15.508 14.214,16.1 13.324,16.1 13.175,15.951 IC3.2 IC3.2@13.175,14.6 ; C16.1 23.051,56.81 23.702,56.16 25.602,56.16 ; IC4.2 25.173,57.077 25.173,56.588 25.602,56.16 ; R15.1 28.168,54.383 28.168,55.337 27.815,55.69 C13.1 26.552,55.69 26.511,55.731 26.03,55.731 25.602,56.16 ; P4.1 41.621,36.337 C23.1 ; R18.1 46.775,37.646 47.123,37.298 47.373,37.298 47.961,36.71 C17.1
  Bottom Layer w0.254: TP7.1 11.4,15.7 11.4,15.9 11.6,16.1 v1(13.2,16.1) ; TP8.1 30.184,55.534 30.634,55.534 v1(30.7,55.6) ; v1@30.7,50.7 30.7,52.3 v1(30.7,54.2) v1(30.7,55.6) ; v1@30.7,59.8 30.7,58.3 30.7,57 v1(30.7,55.6)
  other v1: 27.1,5.4 29.4,5.4 8.2,5.5 11.2,5.5 2.1,11.4 5.3,11.4 3,15.8 3,17.2 60.3,25.6 10,27 11,27 12,27 60.3,27.7 10,28.5 11,28.5 12,28.5 3.3,28.9 60.3,30.4 3.3,30.8 60.3,33.1 60.3,35.5 33.5,38 35.5,38 33.4,41.2 35.3,41.2 3,44.1 30.5,44.6 28.6,44.7 28.6,45.8 3,45.9 30.5,45.9 28.6,46.9 30.5,47.3 28.6,48 30.5,49 30.5,50.7 30.5,52.3 3.3,54.7 3.3,56.4 30.5,57 30.5,58.3 30.5,59.8
NetC5_1: C5.1 C6.2 C8.1 C10.2 C11.2 C12.2 C19.2 C20.2 C21.2 C22.2 IC2.2 M1.1-2-3 M3.5-6-7-8 R5.1 R7.1 R10.1 TP4.1 | length 23.3
  Top Layer w0.254: C8.1 11.715,58.81 12.068,59.163 12.068,60.068 12.5,60.5 14.202,60.5 15.551,59.151 R5.1 15.551,58.849 15,58.298 IC2.2 ; v1(15,56) IC2.2 ; R7.1 18.826,51.975 20.163,51.975 ; R10.1 20.163,51.975 ; IC2.2 15.173,57.077 15.173,56.588 15.67,56.091 16.048,56.091 16.449,55.69 C5.1 17.953,55.337 19.41,55.337 20.163,54.584 20.163,51.975
  Bottom Layer w0.254: TP4.1 13.2,56 v1(15,56)
  other v1: 19.2,34.7 15.2,34.8 23.6,34.8 27.3,34.8 11.6,35.4 27.3,36.1 15.3,36.2 18.7,36.2 19.8,36.2 23.1,36.2 24.2,36.2 11.6,36.3 10.5,44.9 11.7,44.9 12.9,44.9 14.2,44.9 15.5,44.9 16.7,44.9 17.8,44.9 18.9,44.9 19.8,44.9 20.7,44.9 9.2,45 18.9,45.8 19.8,45.8 20.7,45.8 21.6,45.8 18.9,46.7 19.8,46.7 20.7,46.7 21.6,46.7 25.035,47.2 24.21,47.225 18.9,47.6 19.8,47.6 20.7,47.6 21.6,47.6 24.185,47.975 25.035,48 24.16,48.775 25.035,48.775
NetC5_2: C5.2 D1.1 IC2.1 | length 3.5
  Top Layer w0.254: IC2.1 16.01,57.31 C5.2 17.6,58.7 D1.1
NetC7_2: C7.2 IC1.4 R1.1 | length 4.8
  Top Layer w0.254: IC1.4 25.185,17.31 C7.2 R1.1
NetC8_2: C8.2 IC2.4 R2.2 | length 4.4
  Top Layer w0.254: C8.2 R2.2 11.7,55.825 12.775,54.75 IC2.4
NetC9_2: C9.2 D2.1 IC1.1 | length 4
  Top Layer w0.254: D2.1 21.775,14.29 C9.2 23.065,14.59 IC1.1
NetC14_2: C14.2 IC3.4 R9.1 | length 3.7
  Top Layer w0.254: IC3.4 14.806,17.25 15.107,16.949 15.107,16.763 15.46,16.41 C14.2 17.29,16.41 R9.1@17.375,16.325
NetC16_2: C16.2 IC4.4 R10.2 | length 4.1
  Top Layer w0.254: R10.2 C16.2 21.853,54.837 22.929,54.837 23.016,54.75 IC4.4
NetC23_2: C23.2 P4.2 R17.1 R18.2 | length 6.6
  Top Layer w0.254: P4.2 42.97,37.629 C23.2 43.245,37.896 R18.2 R17.1
NetIC1_3: IC1.3 R4.2 | length 4.4
  Top Layer w0.254: IC1.3 25.125,14.45 27.15,12.425 27.699,12.425 R4.2
NetIC1_5: IC1.5 R6.1 | length 4.5
  Top Layer w0.254: IC1.5 23.225,17.55 24.781,19.106 25.75,19.106 26.301,19.657 R6.1
NetIC2_3: IC2.3 R5.2 | length 2.2
  Top Layer w0.254: R5.2 13.449,57.865 13.598,57.716 13.877,57.716 14.05,57.543 IC2.3
NetIC2_5: IC2.5 R3.2 | length 3.8
  Top Layer w0.254: R3.2 13.274,53.051 13.825,53.602 14.341,53.602 14.888,54.15 14.888,54.369 15.269,54.75 IC2.5
NetIC3_3: IC3.3 R11.2 | length 3.9
  Top Layer w0.254: IC3.3 14.125,14.45 14.873,13.702 15.775,13.702 16.826,12.651 R11.2
NetIC3_5: IC3.5 R12.1 | length 2.9
  Top Layer w0.254: R12.1 11.649,18.126 12.225,17.55 IC3.5
NetIC4_3: IC4.3 R14.2 | length 3
  Top Layer w0.254: IC4.3 24.223,57.423 24.223,57.912 24.684,58.373 25.473,58.373 25.949,58.849 R14.2
NetIC4_5: IC4.5 R13.2 | length 3.9
  Top Layer w0.254: R13.2 23.474,52.251 24.025,52.802 24.302,52.802 25.95,54.45 IC4.5
NetM1_4: M1.4 R3.1 R7.2 TP2.1 | length 8.9
  Top Layer w0.254: M1.4 16.615,48.975 16.658,49.018 16.658,49.588 16.67,49.6 16.67,52.456 R3.1 17.398,52.8 18.649,54.051 R7.2
  Bottom Layer w0.254: TP2.1 15.156,50.944 v1(16.637,50.944)
NetM2_4: M2.4 R6.2 R8.1 TP1.1 | length 10.4
  Top Layer w0.254: R8.1 R8.1@21.526,19.851 ; M2.4@22.225,26.525 22.048,26.525 22.005,26.482 22.005,20.33 R8.1@21.526,19.851 ; R6.2 23.191,19.851 R8.1@21.526,19.851
  Bottom Layer w0.254: v1(22,21.5) 23.3,21.5 TP1.1
NetM3_4: M3.4 R13.1 R15.2 TP6.1 | length 8.1
  Top Layer w0.254: v1(26.375,53.425) 26.375,52.151 R13.1 ; M3.4@26.45,48.975 26.627,48.975 26.67,49.018 26.67,51.856 R13.1 ; R15.2 28.449,52 R13.1
  Bottom Layer w0.254: v1(26.375,53.425) 26.925,53.425 TP6.1
NetM4_4: M4.4 R12.2 R16.1 TP5.1 | length 11.6
  Top Layer w0.254: M4.4@13.39,26.525 13.06,26.525 13.017,26.482 13.017,26.037 13.005,26.025 13.005,21.856 14.701,20.159 R12.2 14.844,20.051 R16.1
  Bottom Layer w0.254: v1(13.5,21.3) 13.594,21.3 13.821,21.527 14.727,21.527 TP5.1
"Power In 1": C7.1 C9.1 C19.1 C20.1 C21.1 C22.1 IC1.2 M2.1-2-3 M4.5-6-7-8 P3.2 R4.1 R8.2 R9.2 TP3.1 | length 25.3
  Top Layer w0.254: R9.2 19.525,14.475 21.26,16.21 C9.1 ; R8.2@21.224,17.749 R8.2 21.375,16.31 C9.1 ; R4.1 C7.1 26.158,15.69 26.117,15.731 24.667,15.731 24.348,15.412 24.348,14.923 IC1.2 24.002,14.923 24.002,15.412 23.204,16.21 C9.1
  Top Layer w0.3: 18.8,24.2 18.8,20.173 R8.2@21.224,17.749
  Bottom Layer w0.254: TP3.1 19.934,18.434 20.334,18.434 v1(20.4,18.5)
  other v1: 14.5,26.675 15.375,26.675 14.5,27.45 15.35,27.475 15.325,28.225 14.5,28.25
"Power In 2": C6.1 C10.1 C11.1 C12.1 P3.1
"Power Out": C17.2 C18.2 L1.2 P2.2 R17.2 | length 3.6
  Top Layer w0.254: R17.2 48.707,40 49.417,39.29 C17.2
"Power Out Pre-Filter": C1.2 C2.2 C3.2 C4.2 CE1.1 CE2.1 CE3.1 CE4.1 L1.1 M1.5-6-7-8 M2.5-6-7-8 R1.2 R2.1 | length 10.6
  Top Layer w0.254: C2.2 9.535,52.21 11.3,53.975 R2.1
  Top Layer w0.6: R1.2 28.175,25.075 v1@28.3,25.2
  other v1: 4.6,22.7 5.7,22.7 6.8,22.7 4.6,24.4 5.7,24.4 6.8,24.4 27.3,25.1 28.2,25.1 29.1,25.1 27.3,26 28.2,26 29.1,26 23.55,26.725 24.425,26.725 27.3,26.9 28.2,26.9 29.1,26.9 23.55,27.5 24.4,27.525 27.3,27.8 28.2,27.8 29.1,27.8 24.375,28.275 23.55,28.3 27.3,28.7 28.2,28.7 29.1,28.7 15.01,47.2 14.185,47.225 14.16,47.975 15.01,48 14.135,48.775 15.01,48.775 4.5,50.5 5.5,50.5 6.5,50.5 7.5,50.5 8,51.5 9,51.5 8,52.5 9,52.5 34.8,63.5 49.2,63.6 20.4,63.7 20.4,65.9 34.8,66.1 49.2,66.3
pads on no net: H1.1 H2.1 H3.1 H4.1

## Polygon pours and split planes (outlines as drawn)
GND on Top Layer "GND_L01_P015" (solid, remove dead copper, pour order 15): 26.9,56.2 26.9,53.5 29.5,53.5 29.5,56.2
GND on Top Layer "GND_L01_P014" (solid, remove dead copper, pour order 14): 25.9,48.5 29.5,48.5 29.5,58 27.4,58 27.4,61.1 27.5,61.2 31.3,61.2 31.3,44 25.9,44
"Power Out Pre-Filter" on Top Layer "POWER_OUT_PRE-FILTER_L01_P013" (solid, remove dead copper, pour order 13): 23.1,28.2 24.7,29.8 30.5,29.8 30.5,24.5 23,24.5 23.1,24.6
GND on Top Layer "GND_L01_P011" (solid, remove dead copper, pour order 11): 31.4,0.5 31.4,9.5 10.5,9.5 9,11 9,17.5 4,17.5 3.5,18 3.5,28 4,28.5 6.3,28.5 8.3,26.5 13.8,26.5 13.8,28.5 13.3,29 9.5,29 9.5,29.5 7.1,31.9 7,31.9 7,44 7.8,44 8.5,44 8.5,46.5 8,47 4,47 4,53.5 9.5,53.5 9.5,55.5 10,56 10,61.5 9,61.5 9,66 11,68 68.5,68 68.5,75 6.5,75 6.5,68.5 0.5,68.5 0.5,6.5 6,6.5 6.5,6 6.5,0.5
NetC5_1 on Top Layer "NETC5_1_L01_P009" (solid, remove dead copper, pour order 9): 15.9,48.5 18,48.5 18,52.6 22.3,52.6 22.3,50.7 23,50 25.5,50 25.5,44 8.5,44 8.5,46 15.9,46
"Power Out Pre-Filter" on Top Layer "POWER_OUT_PRE-FILTER_L01_P007" (solid, remove dead copper, pour order 7): 4,53.5 9.5,53.5 9.5,54.5 12.2,54.5 12.2,51 13.2,50 15.5,50 15.5,46.5 15,46 9,46 8,47 4,47
"Power In 1" on Top Layer "POWER_IN_1_L01_P003" (solid, remove dead copper, pour order 3): 7,36.5 11,36.5 11,33.5 27.5,33.5 27.5,30 24.375,30 22.75,28.375 22.75,26.5 21.125,26.5 21.125,23.5 14.75,23.5 14.125,24.125 14.125,28.5 13.375,29.25 9.5,29.25 9.5,29.625 7,32.125
GND on Top Layer "GND_L01_P017" (solid, remove dead copper, pour order 17): 75,37.4 75,24.9 56.1,24.9 48.6,32.4 48.6,37.4
"Power Out" on Top Layer "POWER_OUT_L01_P016" (solid, remove dead copper, pour order 16): 55,50 55.1,50 75,50 75,38.2 75,38.1 75,38 48.6,38 48.6,40.8 54.9,47.1 54.9,50
"Power Out Pre-Filter" on Top Layer "POWER_OUT_PRE-FILTER_L01_P010" (solid, remove dead copper, pour order 10): 9,66 11,68 74.5,68 74.5,56 51.5,56 46,61.5 9,61.5
no net on Top Layer "NONET_L01_P008" (solid, remove dead copper, pour order 8): 19.7,46.7
"Power Out Pre-Filter" on Top Layer "POWER_OUT_PRE-FILTER_L01_P006" (solid, remove dead copper, pour order 6): 4,28 8,28 8,18 4,18
no net on Top Layer "NONET_L01_P005" (solid, remove dead copper, pour order 5): 3.5,28
NetC5_1 on Top Layer "NETC5_1_L01_P004" (solid, remove dead copper, pour order 4): 11.225,39.375 28.125,39.375 28.025,39.275 28.025,33.6 11.275,33.6 11.225,33.65
"Power In 2" on Top Layer "POWER_IN_2_L01_P000" (solid, remove dead copper, pour order 0): 7,38 11,38 11,39.5 29,39.5 29.5,40 29.5,43.5 29,44 7,44
"Power Out Pre-Filter" on Bottom Layer "POWER_OUT_PRE-FILTER_L04_P018" (solid, remove dead copper, pour order 18): 4,66 9.1,66 11.1,68 63.1,68 63.1,61.5 61.2,61.5 32.4,61.5 31.4,60.5 31.4,22.6 12.5,22.6 7.9,18 4,18 4,65.5
GND on Bottom Layer "GND_L04_P019" (solid, remove dead copper, pour order 19): 0,75 75,75 75,0 74.9,-0.1 0,-0.1
NetC5_1 on Bottom Layer "NETC5_1_L04_P012" (solid, remove dead copper, pour order 12): 18,48.5 18,52.6 22.3,52.6 22.3,50.7 23,50 25.5,50 25.5,46 28,43.5 28,33.6 9,33.6 8.9,33.7 8.9,43.8 8.5,44.2 8.5,46 15.9,46 15.9,48.5
GND on Mid 1 (split plane): 74.49,25.151 56.063,25.151 48.651,32.563 48.651,36 48.646,36.039 48.631,36.076 48.607,36.107 48.576,36.131 48.539,36.146 48.5,36.151 47.6,36.151 47.561,36.146 47.524,36.131 47.493,36.107 47.469,36.076 47.454,36.039 47.449,36 47.454,35.961 47.469,35.924 47.493,35.893 47.524,35.869 47.561,35.854 47.6,35.849 48.349,35.849 48.349,32.5 48.354,32.461 48.363,32.439 48.369,32.424 48.393,32.393 55.893,24.893 55.924,24.869 55.939,24.863 55.961,24.854 56,24.849 74.49,24.849 74.49,0.51 31.651,0.51 31.651,60.437 32.263,61.049 54.037,61.049 54.749,60.337 54.749,46.963 48.493,40.707 48.469,40.676 48.463,40.661 48.454,40.639 48.449,40.6 48.449,38.163 48.437,38.151 47.7,38.151 47.661,38.146 47.624,38.131 47.593,38.107 47.569,38.076 47.554,38.039 47.549,38 47.554,37.961 47.569,37.924 47.593,37.893 47.624,37.869 47.661,37.854 47.7,37.849 48.5,37.849 48.539,37.854 48.561,37.863 48.576,37.869 48.607,37.893 48.707,37.993 48.731,38.024 48.737,38.039 48.746,38.061 48.751,38.1 48.751,40.537 55.007,46.793 55.031,46.824 55.046,46.861 55.051,46.9 55.051,60.4 55.046,60.439 55.037,60.461 55.031,60.476 55.007,60.507 54.207,61.307 54.176,61.331 54.139,61.346 54.1,61.351 32.2,61.351 32.161,61.346 32.124,61.331 32.093,61.307 31.393,60.607 31.369,60.576 31.354,60.539 31.349,60.5 31.349,0.51 0.51,0.51 0.51,74.49 74.49,74.49
GND on Mid 2 (split plane): 74.49,25.112 56.046,25.112 56.007,25.107 48.651,32.463 48.651,40.537 54.807,46.693 54.831,46.724 54.846,46.761 54.851,46.8 54.851,61.049 62.5,61.049 62.539,61.054 62.576,61.069 62.607,61.093 62.707,61.193 62.731,61.224 62.746,61.261 62.751,61.3 62.751,68.2 62.746,68.239 62.731,68.276 62.707,68.307 62.676,68.331 62.639,68.346 62.6,68.351 62.561,68.346 62.524,68.331 62.493,68.307 62.437,68.251 6.6,68.251 6.561,68.246 6.524,68.231 6.493,68.207 3.793,65.507 3.769,65.476 3.754,65.439 3.749,65.4 3.749,18 3.754,17.961 3.769,17.924 3.793,17.893 3.824,17.869 3.861,17.854 3.9,17.849 8.5,17.849 8.539,17.854 8.576,17.869 8.607,17.893 10.607,19.893 10.631,19.924 10.637,19.939 10.646,19.961 10.651,20 10.651,21.937 11.063,22.349 31.349,22.349 31.349,0.51 0.51,0.51 0.51,74.49 74.49,74.49
"Power Out Pre-Filter" on Mid 2 (split plane): 62.449,61.363 62.437,61.351 32.2,61.351 32.161,61.346 32.124,61.331 32.093,61.307 31.393,60.607 31.369,60.576 31.354,60.539 31.349,60.5 31.349,60.4 31.349,22.651 11,22.651 10.961,22.646 10.924,22.631 10.893,22.607 10.393,22.107 10.369,22.076 10.363,22.061 10.354,22.039 10.349,22 10.349,20.063 8.437,18.151 4.051,18.151 4.051,65.337 6.663,67.949 62.449,67.949
GND on Mid 2 (split plane): 54.549,46.863 48.393,40.707 48.369,40.676 48.363,40.661 48.354,40.639 48.349,40.6 48.349,32.4 48.354,32.361 48.363,32.339 48.369,32.324 48.393,32.293 55.793,24.893 55.824,24.869 55.861,24.854 55.9,24.849 55.939,24.854 55.97,24.83 56.007,24.815 56.046,24.81 74.49,24.81 74.49,0.51 31.651,0.51 31.651,22.5 31.651,60.4 31.651,60.437 32.263,61.049 54.549,61.049
NetC5_1 on Mid 2 (split plane): 20.349,52.937 20.349,46.7 20.354,46.661 20.363,46.639 20.369,46.624 20.393,46.593 22.793,44.193 22.824,44.169 22.861,44.154 22.9,44.149 23.737,44.149 27.849,40.037 27.849,33.863 27.837,33.851 11.3,33.851 11.261,33.846 11.224,33.831 11.193,33.807 11.169,33.776 11.159,33.751 7.141,33.751 7.131,33.776 7.107,33.807 7.076,33.831 7.051,33.841 7.051,48.237 11.763,52.949 20.337,52.949

## Other copper
Bottom Layer:
  pour cut-out: 31.4,0 31.4,60.5 32.2,61.3 55.2,61.3 55.2,47 48.7,40.5 48.7,32.5 56,25.2 75,25.2 75,24.9 55.9,24.9 48.4,32.4 48.4,40.7 54.7,47 54.7,60.7 54.4,61 32.2,61 31.7,60.5 31.7,0
Mid 1 (plane layer: these items are gaps in the copper):
  lines w0.3: 31.5,0 31.5,60.5 32.2,61.2 54.1,61.2 54.9,60.4 54.9,46.9 48.6,40.6 48.6,38.1 48.5,38 47.7,38 ; 47.6,36 48.5,36 48.5,32.5 56,25 74.9,25
Mid 2 (plane layer: these items are gaps in the copper):
  lines w0.3: 7,33.7 6.9,33.6 ; 11.2,33.6 6.9,33.6 ; 11.3,33.7 27.9,33.7 28,33.8 28,40.1 23.8,44.3 22.9,44.3 20.5,46.7 20.5,53 20.4,53.1 11.7,53.1 6.9,48.3 6.9,33.6 ; 31.5,0.1 31.5,22.5 ; 54.7,61.2 54.7,46.8 48.5,40.6 48.5,32.4 55.9,25 ; 56.046,24.961 74.839,24.961 ; 31.5,22.5 31.5,60.4 31.5,60.5 32.2,61.2 62.5,61.2 62.6,61.3 62.6,68.2 62.5,68.1 6.6,68.1 3.9,65.4 3.9,18 8.5,18 10.5,20 10.5,22 11,22.5 21,22.5 31.5,22.5

## Silkscreen, mask and mechanical layers (free items; w line width, h text height)
Top Overlay:
  text "Power Out" at 73.525,46.8 h0.8 r90
  text "5V" at 36.05,41.75 h0.8
  text "GND" at 38.6,41.575 h0.8
  text "ADC" at 42.2,32.375 h0.8
  text "GND" at 39.075,32.3 h0.8
  text "GND" at 73.675,26.125 h0.8 r90
Bottom Overlay:
  text "Power Out" at 66.85,40.775 h0.8
  text "GND" at 67.6,33.2 h0.8
Board Outline:
  the board outline again, w0.3

## Text inside footprints (layer, text, board x,y; h text height)
CE1: Top Overlay "+" at 13.788,63.825 h0.8 r90
CE2: Top Overlay "+" at 28.092,63.825 h0.8 r90
CE3: Top Overlay "+" at 42.396,63.825 h0.8 r90
CE4: Top Overlay "+" at 56.7,63.825 h0.8 r90